# EAGLE board LeatherSynth (EAGLE 6.4)

Size 100.25 x 80.26 mm. Coordinates in mm from the lower left corner, seen from the top.
Outline: 100.08,0.25 0.25,0.25 0.25,80.25 100.25,80.25 100.25,0.25 100.08,0.25
Outline: 0,0 100.08,80.01
Outline: 0.51,80.26 100.08,0.25
Copper layers (1*16): Top 0.035mm / dielectric 1.5mm / Bottom 0.035mm
Design rules "default": minimum track width 10mil, minimum drill 24mil, track to track 8mil, track to pad 8mil, pad to pad 8mil, via to via 8mil, smd to smd 8mil, copper to edge 40mil, drill to drill 8mil, minimum pad ring 10mil, minimum via ring 8mil, stop-mask expansion 4mil, vias tented up to drill 0mil, thermal gap 10mil

## Footprints (pad centres in the part's own frame; a part is rotated, then mirrored left to right if it is on the bottom)
C2220K = smd 1.85 x 5.5: 1 -2.55,0; 2 2.55,0
DO35-10 = drill 0.813 long: A 5.08,0; C -5.08,0
DIL08 = drill 0.813 pad 1.27: 1 -3.81,-3.81; 2 -1.27,-3.81; 3 1.27,-3.81; 4 3.81,-3.81; 5 3.81,3.81; 6 1.27,3.81; 7 -1.27,3.81; 8 -3.81,3.81
PLCC2 = smd 2.6 x 1.5: A 0,1.7; C 0,-1.7
TO92 = drill 0.813 octagon: 1 1.27,0; 2 0,1.905; 3 -1.27,0
R2010 = smd 1.8 x 2.7: 1 -2.2,0; 2 2.2,0
3223J = smd 1.6 x 0.9: 1 -2,1.4; 3 -2,-1.4 | smd 1.6 x 1.3: 2 2,0
SMS-001 = smd 1.092 x 2.007: 1 0,-4.496; 2 0,4.496
MA03-1 = drill 1.016 long: 1 -2.54,0; 2 0,0; 3 2.54,0
AYZ0202 = smd 1 x 1.15: 1 -2.5,2.825; 2 0,2.825; 3 2.5,2.825; 4 -2.5,-2.825; 5 0,-2.825; 6 2.5,-2.825 | hole 0.85: 1.5,0; -1.5,0
22-23-2021 = drill 1 long: 1 -1.27,0; 2 1.27,0

## Placement (x,y rotation side)
C1  15nF  [C2220K]  70.36,54.36 0 top
C2  220pF  [C2220K]  61.98,47.24 180 top
C3  33nF  [C2220K]  91.19,46.48 0 top
C4  100nF  [C2220K]  80.52,47.24 0 top
C5  15nF  [C2220K]  51.56,22.35 0 top
C6  15nF  [C2220K]  70.87,47.24 0 top
C7  15nF  [C2220K]  88.39,53.09 0 top
C8  100nF  [C2220K]  79.25,53.85 0 top
C9  100nF  [C2220K]  76.96,61.72 0 top
C10  33uF  [C2220K]  24.38,57.4 0 top
C11  1uF  [C2220K]  13.97,49.28 0 top
C12  0,47uF  [C2220K]  23.11,48.51 0 top
C13  0,47uF  [C2220K]  51.56,28.7 0 top
D1  1N4148DO35-10  [DO35-10]  51.56,17.78 180 top
D2  1N4148DO35-10  [DO35-10]  60.71,23.37 270 top
D3  1N4148DO35-10  [DO35-10]  43.18,22.86 270 top
IC1  TL072P  [DIL08]  50.55,40.39 270 top
LED1  LG_T679-E1F1-1  [PLCC2]  51.82,13.72 90 top
Q1  BC557  [TO92]  50.55,52.07 180 top
R1  220  [R2010]  34.04,77.98 0 top
R2  1K  [R2010]  15.49,55.63 0 top
R3  2,7K  [R2010]  67.06,70.87 180 top
R4  4,7  [R2010]  62.23,53.59 0 top
R5  6,8  [R2010]  57.66,75.44 270 top
R6  8,2  [R2010]  66.8,66.55 180 top
R7  10K  [R2010]  68.07,60.45 180 top
R8  22K  [R2010]  61.72,39.37 0 top
R9  47K  [R2010]  61.98,35.56 0 top
R10  82K  [R2010]  42.16,73.41 180 top
R11  100K  [R2010]  6.86,51.56 90 top
R12  470K  [R2010]  61.98,31.75 0 top
R13  1M  [R2010]  51.31,33.53 0 top
R14  4,7  [R2010]  43.43,51.82 0 top
R15  4,7  [R2010]  67.31,77.98 0 top
R16  10K  [R2010]  26.42,65.53 90 top
R17  10K  [R2010]  37.08,63.5 180 top
R18  10K  [R2010]  34.8,71.63 180 top
R19  22K  [R2010]  48.51,57.91 90 top
R20  22K  [R2010]  35.56,67.31 180 top
R21  47K  [R2010]  39.88,44.45 180 top
R22  100K  [R2010]  37.59,27.18 0 top
R23  100K  [R2010]  39.62,39.12 0 top
R24  100K  [R2010]  37.85,32.26 0 top
R25  100K  [R2010]  31.75,52.32 0 top
R26  1M  [R2010]  30.99,46.48 90 top
R27  1M  [R2010]  35.05,59.18 180 top
R28  50K  [3223J]  41.15,6.86 0 top
R29  500K  [3223J]  60.96,6.86 180 top
R30  10K  [3223J]  40.89,11.94 180 top
R31  100K  [R2010]  52.83,57.91 90 top
R32  100K  [3223J]  61.21,11.68 0 top
R33  10K  [R2010]  39.88,35.56 0 top
S1  SWS001  [SMS-001]  50.29,79.5 90 top
SV1  [MA03-1]  51.82,2.29 0 top
T1  BC547  [TO92]  41.91,59.18 90 top
T2  BC547  [TO92]  59.94,58.93 270 top
T3  BC547  [TO92]  42.16,67.31 90 top
T4  BC547  [TO92]  59.69,66.55 270 top
T5  BC547  [TO92]  50.29,71.37 0 top
U$1  [LEATHERSYNTH]  -34.04,-34.04 0 top  (outside the outline)
U$2  [LEATHERSYNTH2]  -36.58,-93.98 0 top  (outside the outline)
U$3  AYZ0202  [AYZ0202]  51.82,7.87 180 top
X1  22-23-2021  [22-23-2021]  2.03,45.97 90 top
X2  22-23-2021  [22-23-2021]  98.55,47.24 270 top

## Library data of the parts
C1-C13 = rcl
D1-D3 = diode
IC1 = linear
LED1 = led; COLOR: green
Q1 = transistor-pnp
R1-R27 R31 R33 = eagle-ltspice; SPICEMODEL: NONE; SPICEPREFIX: R
R28-R30 R32 = pot
S1 = smd-special
SV1 = con-lstb; OC_FARNELL: unknown; OC_NEWARK: unknown
T1-T5 = transistor
U$1 U$2 = hannah
U$3 = SparkFun-Electromechanical
X1 X2 = con-molex; MF: MOLEX; MPN: 22-23-2021; OC_FARNELL: 1462926; OC_NEWARK: 25C3832

## Nets
+9V: IC1.8 LED1.A R19.2 R27.2 R31.2 S1.2 SV1.3
-9V: IC1.4 R5.1 R33.1 SV1.1
B2: T5.3
GND: C2.2 C4.2 C8.2 D1.C D2.A R3.1 R4.1 R8.1 R11.1 R18.1 R24.1 R25.1 R28.2 R32.1 T1.1 T2.1 T3.1 T4.1 U$3.2 X1.2 X2.2
N$1: R12.1 R13.2
N$2: C3.2 IC1.7 R9.2 R12.2
N$3: C10.1 R19.1 R23.1 T1.3
N$4: IC1.5 R9.1 R21.2 R29.1
N$5: IC1.6 R8.2
N$6: C3.1 R29.2
N$7: C5.2 IC1.1 R21.1 R26.2
N$8: R16.2 R30.3
N$9: C4.1 C12.1 R16.1 R30.1 R30.2
N$10: C12.2 R32.3
N$11: C13.1 R32.2
N$12: C13.2 R10.1
N$13: R10.2 R25.2 T5.2
N$14: C11.1 R2.1 R11.2
N$15: LED1.C R33.2
N$16: C2.1 C11.2 R5.2 T5.1
N$17: SV1.2 U$3.1
N$18: C10.2 D1.A R13.1
N$20: C1.2 C5.1 R7.1
N$21: R7.2 R28.3 T2.3
N$24: C1.1 IC1.3 R23.2 R26.1 T2.2
N$26: C6.2 D2.C IC1.2 R4.2 R22.2
N$31: C8.1 R27.1 T1.2 T4.3
N$34: R3.2 R6.2 T4.2
N$38: C6.1 Q1.3 R6.1 R22.1
N$39: Q1.1 R14.2 R31.1
N$42: Q1.2 R14.1 R17.2
N$43: R17.1 T3.3
N$46: D3.A S1.1
N$47: C9.1 D3.C R24.2
N$48: C9.2 R20.2
N$49: R18.2 R20.1 T3.2
N$52: R2.2 X1.1 X2.1

## Tracks (layer width: path | path; a pad name or v marks a point on that pad's centre or on a via)
+9V  (6 unrouted)
-9V  (3 unrouted)
GND  (20 unrouted)
N$1  (1 unrouted)
N$2  (3 unrouted)
N$3  (3 unrouted)
N$4  (3 unrouted)
N$5  (1 unrouted)
N$6  (1 unrouted)
N$7  (3 unrouted)
N$8  (1 unrouted)
N$9  (4 unrouted)
N$10  (1 unrouted)
N$11  (1 unrouted)
N$12  (1 unrouted)
N$13  (2 unrouted)
N$14  (2 unrouted)
N$15  (1 unrouted)
N$16  (3 unrouted)
N$17  (1 unrouted)
N$18  (2 unrouted)
N$20  (2 unrouted)
N$21  (2 unrouted)
N$24  (4 unrouted)
N$26  (4 unrouted)
N$31  (3 unrouted)
N$34  (2 unrouted)
N$38  (3 unrouted)
N$39  (2 unrouted)
N$42  (2 unrouted)
N$43  (1 unrouted)
N$46  (1 unrouted)
N$47  (2 unrouted)
N$48  (1 unrouted)
N$49  (2 unrouted)
N$52  (2 unrouted)